# EAGLE board main controler-old2 (EAGLE 9.5.2)
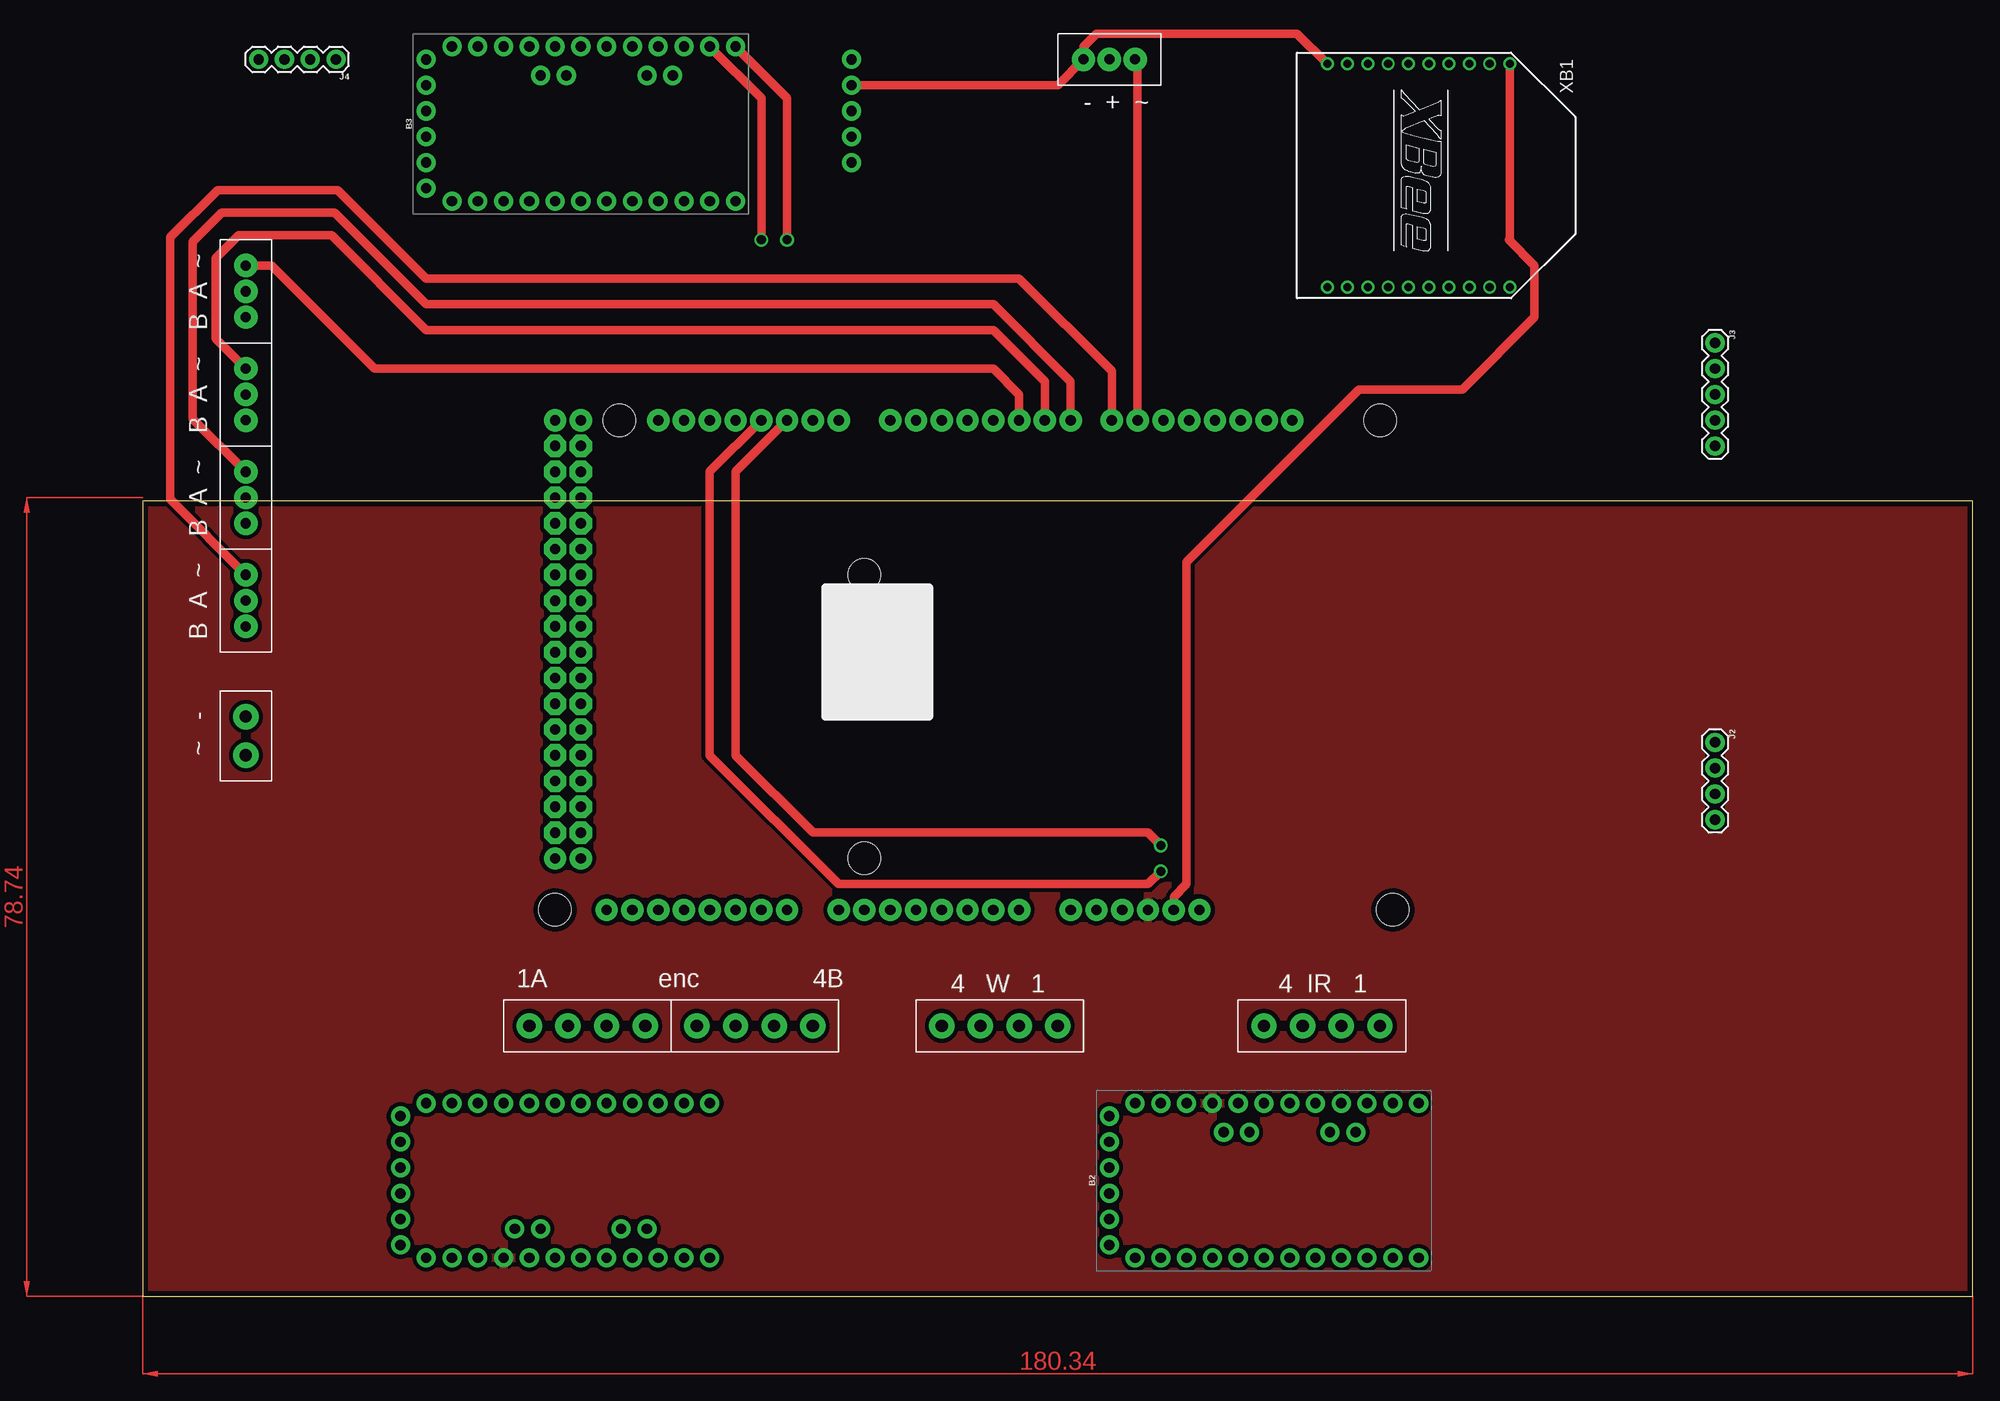
[diagram p0: board, top side]
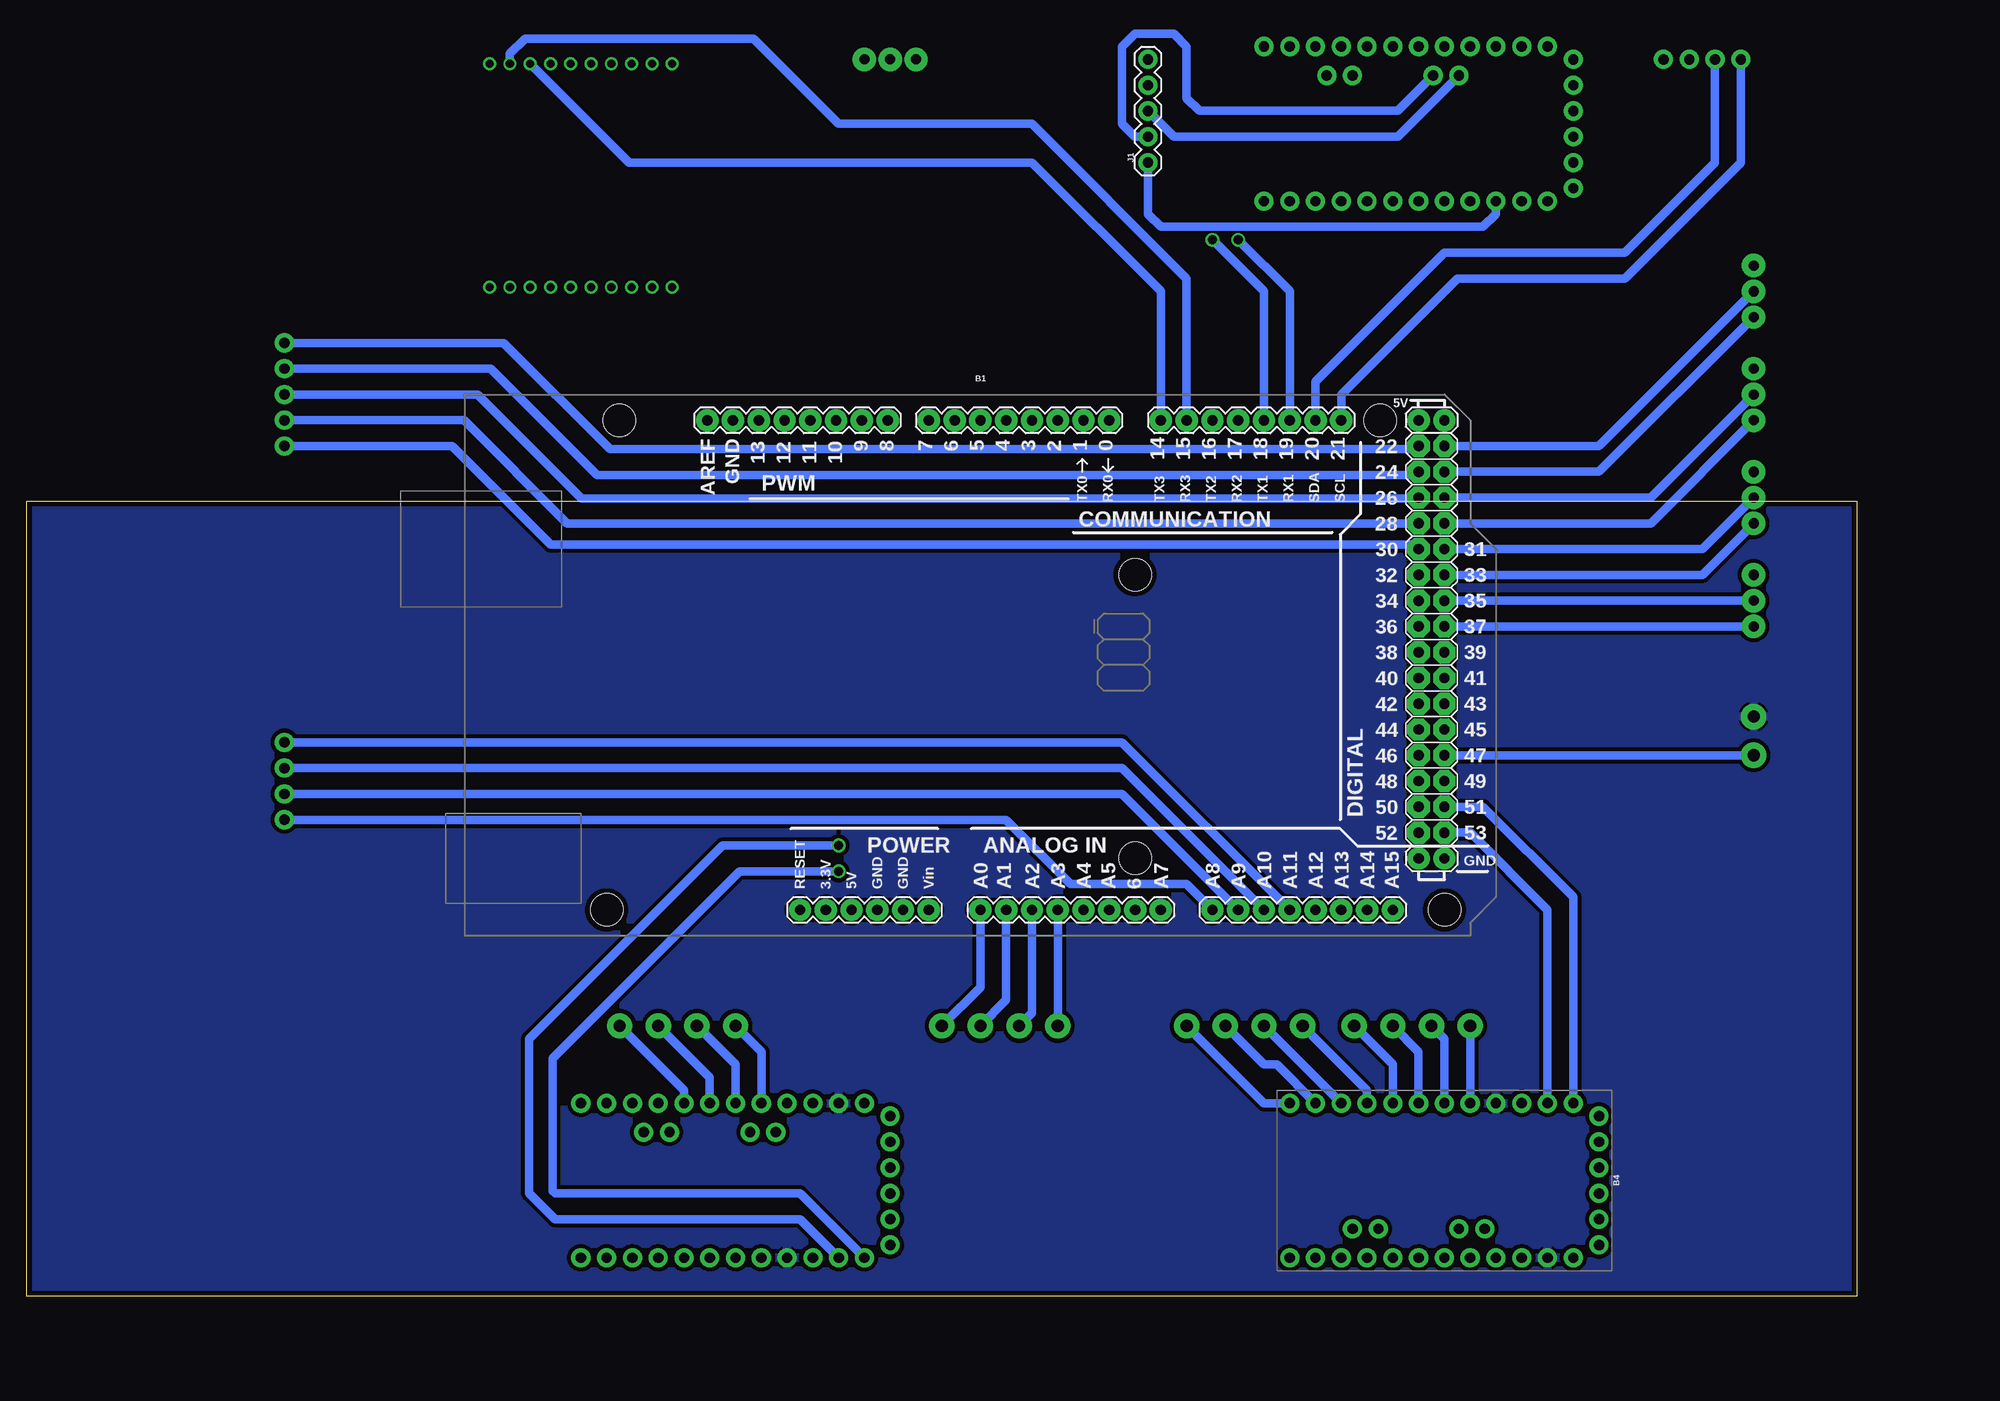
[diagram p1: board, bottom side, seen from below]

Size 180.32 x 78.41 mm. Coordinates in mm from the lower left corner, seen from the top.
Outline: 0,0 180.32,0 180.32,78.41 0,78.41 0,0
Copper layers (1*16): Top 0.035mm / dielectric 1.6mm / Bottom 0.035mm
Design rules "Elecrow_2-layer_PCB_eagle_rule": minimum track width 6mil, minimum drill 12mil, track to track 6mil, track to pad 6mil, pad to pad 6mil, via to via 8mil, smd to smd 0mil, copper to edge 20mil, drill to drill 10mil, minimum pad ring 6mil, minimum via ring 6mil, stop-mask expansion 0mil, vias tented up to drill 100mil, thermal gap 10mil

## Footprints (pad centres in the part's own frame; a part is rotated, then mirrored left to right if it is on the bottom)
ARDUINO_MEGA = drill 1.016 pad 2.2: 0 13.97,24.13; 1 11.43,24.13; 2 8.89,24.13; 3 6.35,24.13; 3.3V -13.97,-24.13; 4 3.81,24.13; 5 1.27,24.13; 5V@0 -11.43,-24.13; 5V@1 44.45,24.13; 5V@2 46.99,24.13; 6 -1.27,24.13; 7 -3.81,24.13; 8 -7.874,24.13; 9 -10.414,24.13; 10 -12.954,24.13; 11 -15.494,24.13; 12 -18.034,24.13; 13 -20.574,24.13; 14 19.05,24.13; 15 21.59,24.13; 16 24.13,24.13; 17 26.67,24.13; 18 29.21,24.13; 19 31.75,24.13; 20 34.29,24.13; 21 36.83,24.13; A0 1.27,-24.13; A1 3.81,-24.13; A2 6.35,-24.13; A3 8.89,-24.13; A4 11.43,-24.13; A5 13.97,-24.13; A6 16.51,-24.13; A7 19.05,-24.13; A8 24.13,-24.13; A9 26.67,-24.13; A10 29.21,-24.13; A11 31.75,-24.13; A12 34.29,-24.13; A13 36.83,-24.13; A14 39.37,-24.13; A15 41.91,-24.13; AREF -25.654,24.13; GND@0 -8.89,-24.13; GND@1 -6.35,-24.13; GND@2 44.45,-19.05; GND@3 46.99,-19.05; GND@4 -23.114,24.13; RESET -16.51,-24.13; VIN -3.81,-24.13 | drill 1.016 pad 2.2 octagon: 22 44.45,21.59; 23 46.99,21.59; 24 44.45,19.05; 25 46.99,19.05; 26 44.45,16.51; 27 46.99,16.51; 28 44.45,13.97; 29 46.99,13.97; 30 44.45,11.43; 31 46.99,11.43; 32 44.45,8.89; 33 46.99,8.89; 34 44.45,6.35; 35 46.99,6.35; 36 44.45,3.81; 37 46.99,3.81; 38 44.45,1.27; 39 46.99,1.27; 40 44.45,-1.27; 41 46.99,-1.27; 42 44.45,-3.81; 43 46.99,-3.81; 44 44.45,-6.35; 45 46.99,-6.35; 46 44.45,-8.89; 47 46.99,-8.89; 48 44.45,-11.43; 49 46.99,-11.43; 50 44.45,-13.97; 51 46.99,-13.97; 52 44.45,-16.51; 53 46.99,-16.51 | hole 3.2: -34.29,24.13; -35.56,-24.13; 16.51,8.89; 16.51,-19.05; 40.64,24.13; 46.99,-24.13
ARDUINO_PRO_MINI = drill 1.016 pad 1.88: 1 -7.62,12.7; 2 -7.62,10.16; 3 -7.62,7.62; 4 -7.62,5.08; 5 -7.62,2.54; 6 -7.62,0; 7 -7.62,-2.54; 8 -7.62,-5.08; 9 -7.62,-7.62; 10 -7.62,-10.16; 11 -7.62,-12.7; 12 -7.62,-15.24; 13 7.62,-15.24; 14 7.62,-12.7; 15 7.62,-10.16; 16 7.62,-7.62; 17 7.62,-5.08; 18 7.62,-2.54; 19 7.62,0; 20 7.62,2.54; 21 7.62,5.08; 22 7.62,7.62; 23 7.62,10.16; 24 7.62,12.7; A4 4.763,1.429; A5 4.763,3.969; A6 4.763,-9.049; A7 4.763,-6.509; BLK -6.35,15.24; GND -3.81,15.24; GRN 6.35,15.24; RXI 1.27,15.24; TXO 3.81,15.24; VCC -1.27,15.24
2PIN = drill 1.2 pad 2.5: 1 0,0; 2 3.81,0; 3 7.62,0; 4 11.43,0
1X05 = drill 1.016 pad 1.88: 1 0,0; 2 2.54,0; 3 5.08,0; 4 7.62,0; 5 10.16,0
1X04 = drill 1.016 pad 1.88: 1 0,0; 2 2.54,0; 3 5.08,0; 4 7.62,0
3PIN = drill 1 pad 2.3: P$1 0,0; P$2 2.54,0; P$3 5.08,0
2PIN' = drill 1.2 pad 2.5: 1 0,0; 2 3.81,0
XBEE = drill 0.8 pad 1.27: 1 -11,9; 2 -11,7; 3 -11,5; 4 -11,3; 5 -11,1; 6 -11,-1; 7 -11,-3; 8 -11,-5; 9 -11,-7; 10 -11,-9; 11 11,-9; 12 11,-7; 13 11,-5; 14 11,-3; 15 11,-1; 16 11,1; 17 11,3; 18 11,5; 19 11,7; 20 11,9

## Placement (x,y rotation side)
B1  ARDUINO_MEGA_R3FULL  [ARDUINO_MEGA]  87.63,62.23 0 bottom
B2  ARDUINO_PRO_MINI  [ARDUINO_PRO_MINI]  110.49,11.43 90 top
B3  ARDUINO_PRO_MINI  [ARDUINO_PRO_MINI]  43.18,115.57 90 top  (outside the outline)
B4  ARDUINO_PRO_MINI  [ARDUINO_PRO_MINI]  40.64,11.43 270 bottom
ENCODER1  2PIN  [2PIN]  54.61,26.67 0 top
ENCODER2  2PIN  [2PIN]  38.1,26.67 0 top
ENCODER3  2PIN  [2PIN]  90.17,26.67 180 top
ENCODER4  2PIN  [2PIN]  121.92,26.67 180 top
J1  [1X05]  69.85,111.76 90 bottom  (outside the outline)
J2  [1X04]  154.94,54.61 270 top
J3  [1X05]  154.94,93.98 270 top  (outside the outline)
J4  [1X04]  19.05,121.92 180 top  (outside the outline)
MOTOR1  3PIN  [3PIN]  10.16,101.6 270 top  (outside the outline)
MOTOR2  3PIN  [3PIN]  10.16,91.44 270 top  (outside the outline)
MOTOR3  3PIN  [3PIN]  10.16,81.28 270 top
MOTOR4  3PIN  [3PIN]  10.16,71.12 270 top
MOTOR5  3PIN  [3PIN]  97.79,121.92 180 top  (outside the outline)
SOLENOID  2PIN  [2PIN']  10.16,53.34 90 top
XB1  XBEE  [XBEE]  125.73,110.49 270 top  (outside the outline)

## Library data of the parts
B1-B4 = Arduino
ENCODER1-ENCODER4 = 4pin_small
J1 J3 = SparkFun-Connectors
J2 J4 = SparkFun-Connectors; PROD_ID: CONN-09696
MOTOR1-MOTOR5 = 3PIN_2
SOLENOID = 2pin_small
XB1 = maxstream; MPN: XBP24-Z7UIT-004; OC_FARNELL: 1751799; OC_NEWARK: 34R5507

## Nets
1_A: B4.5 ENCODER2.1
1_B: B4.6 ENCODER2.2
2_A: B4.7 ENCODER2.3
2_B: B4.8 ENCODER2.4
3_A: B4.9 ENCODER1.1
3_B: B4.10 ENCODER1.2
4_A: B4.11 ENCODER1.3
4_B: B4.12 ENCODER1.4
A1: B1.23 MOTOR1.P$2
A2: B1.27 MOTOR2.P$2
A3: B1.31 MOTOR3.P$2
A4: B1.35 MOTOR4.P$2
B1: B1.25 MOTOR1.P$3
B2: B1.29 MOTOR2.P$3
B3: B1.33 MOTOR3.P$3
B4: B1.37 MOTOR4.P$3
BALL_SENSOR: B1.49
BUTTON: B1.45
DRIBBLER: B1.9 MOTOR5.P$1
GND: B1.GND@4 B2.4 B2.23 B3.4 B3.23 B4.4 B4.23 J1.4 J4.1 MOTOR5.P$3 SOLENOID.2 XB1.10
INT: B3.3 J1.1
IR1: B2.17 ENCODER4.1
IR2: B2.18 ENCODER4.2
IR3: B2.19 ENCODER4.3
IR4: B2.20 ENCODER4.4
N$1: B1.3.3V XB1.1
N$2: B1.15 XB1.2
N$3: B1.17 B2.1
N$4: B1.16 B2.2
N$5: B1.14 XB1.3
N$6: B1.19 B3.14
N$7: B1.18 B3.13
N$8: B1.51 B4.1
N$9: B1.53 B4.2
N$10: B2.24
N$11: B3.24
N$12: B4.24
N$13: B1.22 J3.1
N$14: B1.24 J3.2
N$15: B1.26 J3.3
N$16: B1.28 J3.4
N$17: B1.30 J3.5
N$18: B1.A8 J2.4
N$19: B1.A9 J2.3
N$20: B1.A10 J2.2
N$21: B1.A11 J2.1
N$22: B1.21 J4.4
N$23: B1.20 J4.3
PWM1: B1.5 MOTOR1.P$1
PWM2: B1.6 MOTOR2.P$1
PWM3: B1.7 MOTOR3.P$1
PWM4: B1.8 MOTOR4.P$1
SCL: B3.A5 J1.3
SDA: B3.A4 J1.2
SOLENOID: B1.47 SOLENOID.1
VCC: B1.5V@0 B1.5V@1 B1.5V@2 B2.21 B3.21 B4.21 J1.5 J4.2 MOTOR5.P$2
W1: B1.A0 ENCODER3.1
W2: B1.A1 ENCODER3.2
W3: B1.A2 ENCODER3.3
W4: B1.A3 ENCODER3.4

## Tracks (layer width: path | path; a pad name or v marks a point on that pad's centre or on a via)
1_A
  Bottom 0.813: ENCODER2.1 B4.5
1_B
  Bottom 0.813: ENCODER2.2 40.64,25.4 B4.6
2_A
  Bottom 0.813: ENCODER2.3 43.18,24.13 B4.7
2_B
  Bottom 0.813: ENCODER2.4 45.72,22.86 B4.8
3_A
  Bottom 0.813: ENCODER1.1 48.26,20.32 B4.9
3_B
  Bottom 0.813: ENCODER1.2 B4.10
4_A
  Bottom 0.813: ENCODER1.3 58.42,22.86 57.15,22.86 B4.11
4_B
  Bottom 0.813: ENCODER1.4 58.42,19.05 B4.12
A1
  Bottom 0.813: B1.23 25.4,83.82 MOTOR1.P$2
A2
  Bottom 0.813: MOTOR2.P$2 20.32,78.74 B1.27
A3
  Bottom 0.813: MOTOR3.P$2 15.24,73.66 B1.31
A4
  Bottom 0.813: MOTOR4.P$2 B1.35
B1
  Bottom 0.813: B1.25 25.4,81.28 MOTOR1.P$3
B2
  Bottom 0.813: MOTOR2.P$3 20.32,76.2 B1.29
B3
  Bottom 0.813: MOTOR3.P$3 15.24,71.12 B1.33
B4
  Bottom 0.813: MOTOR4.P$3 B1.37
DRIBBLER
  Top 0.813: B1.9 98.04,121.67 MOTOR5.P$1
GND
  Top 0.813: XB1.10 113.76,124.46 93.98,124.46 92.71,123.19 MOTOR5.P$3 90.17,119.38 J1.4
  pour Bottom (isolate 0.406): 0,78.74 0,0 180.34,0 180.34,78.74
INT
  Bottom 0.813: B3.3 35.56,106.68 36.83,105.41 68.58,105.41 69.85,106.68 J1.1
IR1
  Bottom 0.813: ENCODER4.1 115.57,20.32 B2.17
IR2
  Bottom 0.813: ENCODER4.2 113.03,21.59 B2.18
IR3
  Bottom 0.813: ENCODER4.3 110.49,22.86 B2.19
IR4
  Bottom 0.813: ENCODER4.4 107.95,24.13 B2.20
N$1
  Top 0.813: XB1.1 134.73,104.25 134.62,104.14 137.16,101.6 137.16,96.52 130.02,89.38 119.86,89.38 102.87,72.39 102.87,40.64 101.6,39.37 B1.3.3V
N$2
  Bottom 0.813: XB1.2 132.73,122.47 131.23,123.98 108.74,123.98 100.33,115.57 81.28,115.57 66.04,100.33 B1.15
N$3  (via drill 0.9)
  Top 0.813: B1.17 55.88,81.28 55.88,53.34 68.58,40.64 99.06,40.64 v100.33,41.91
  Bottom 0.813: B2.1 104.14,10.16 128.27,10.16 128.5,10.39 128.5,23.48 110.07,41.91 v100.33,41.91
N$4  (via drill 0.9)
  Top 0.813: B1.16 58.42,81.28 58.42,53.34 66.04,45.72 99.06,45.72 v100.33,44.45
  Bottom 0.813: B2.2 104.14,7.62 128.27,7.62 130.81,10.16 130.81,25.4 111.76,44.45 v100.33,44.45
N$5
  Bottom 0.813: XB1.3 121,111.76 81.28,111.76 68.58,99.06 B1.14
N$6  (via drill 0.9)
  Top 0.813: B3.14 60.96,118.11 v60.96,104.14
  Bottom 0.813: B1.19 55.88,99.06 v60.96,104.14
N$7  (via drill 0.9)
  Top 0.813: B3.13 63.5,118.11 v63.5,104.14
  Bottom 0.813: B1.18 58.42,99.06 v63.5,104.14
N$8
  Bottom 0.813: B4.1 27.94,39.37 36.83,48.26 B1.51
N$9
  Bottom 0.813: B1.53 38.1,45.72 30.48,38.1 B4.2
N$13
  Bottom 0.813: B1.22 43.5,83.5 122.88,83.5 133.35,93.98 J3.1
N$14
  Bottom 0.813: B1.24 43.53,80.93 124.11,80.93 134.62,91.44 J3.2
N$15
  Bottom 0.813: B1.26 43.26,78.66 125.65,78.66 135.89,88.9 J3.3
N$16
  Bottom 0.813: J3.4 137.25,86.36 127.09,76.2 B1.28
N$17
  Bottom 0.813: B1.30 43.63,74.11 128.72,74.11 138.43,83.82 J3.5
N$18
  Bottom 0.813: B1.A8 66.04,40.64 77.51,40.64 83.86,46.99 J2.4
N$19
  Bottom 0.813: B1.A9 72.39,49.53 J2.3
N$20
  Bottom 0.813: B1.A10 72.39,52.07 J2.2
N$21
  Bottom 0.813: B1.A11 72.39,54.61 J2.1
N$22
  Bottom 0.813: J4.4 11.43,111.76 22.86,100.33 39.37,100.33 50.8,88.9 B1.21
N$23
  Bottom 0.813: B1.20 53.34,90.17 40.64,102.87 22.86,102.87 13.97,111.76 J4.3
PWM1
  Top 0.813: MOTOR1.P$1 12.7,101.6 22.86,91.44 83.82,91.44 86.36,88.9 B1.5
PWM2
  Top 0.813: B1.6 88.9,90.17 83.82,95.25 27.94,95.25 18.61,104.58 9.45,104.58 7.18,102.31 7.18,94.42 MOTOR2.P$1
PWM3
  Top 0.813: B1.7 91.44,90.17 83.82,97.79 27.94,97.79 18.92,106.81 7.78,106.81 4.95,103.98 4.95,86.49 MOTOR3.P$1
PWM4
  Top 0.813: B1.8 95.5,91.19 86.36,100.33 27.94,100.33 19.22,109.05 7.38,109.05 2.71,104.38 2.71,78.57 MOTOR4.P$1
SCL
  Bottom 0.813: J1.3 67.31,114.3 45.24,114.3 B3.A5
SDA
  Bottom 0.813: B3.A4 45.24,116.84 64.77,116.84 66.04,118.11 66.04,123.19 67.31,124.46 71.12,124.46 72.39,123.19 72.39,115.57 71.12,114.3 J1.2
SOLENOID
  Bottom 0.813: B1.47 SOLENOID.1
VCC
  pour Top (isolate 0.406): 0,78.74 0,0 180.34,0 180.34,78.74
W1
  Bottom 0.813: B1.A0 86.36,30.48 ENCODER3.1
W2
  Bottom 0.813: B1.A1 83.82,29.21 ENCODER3.2
W3
  Bottom 0.813: B1.A2 81.28,27.94 ENCODER3.3
W4
  Bottom 0.813: B1.A3 ENCODER3.4
(copper drawn outside any net)
  shapes: Top area x2

## Text on the board
tNames: - + ~ | B A ~ | B A ~ | B A ~ | B A ~ | ~ - | 4 W 1 | 4 IR 1 | 1A | enc | 4B